# EAGLE board 20160614_DWC_LSM9DS1 (EAGLE 7.4.0)
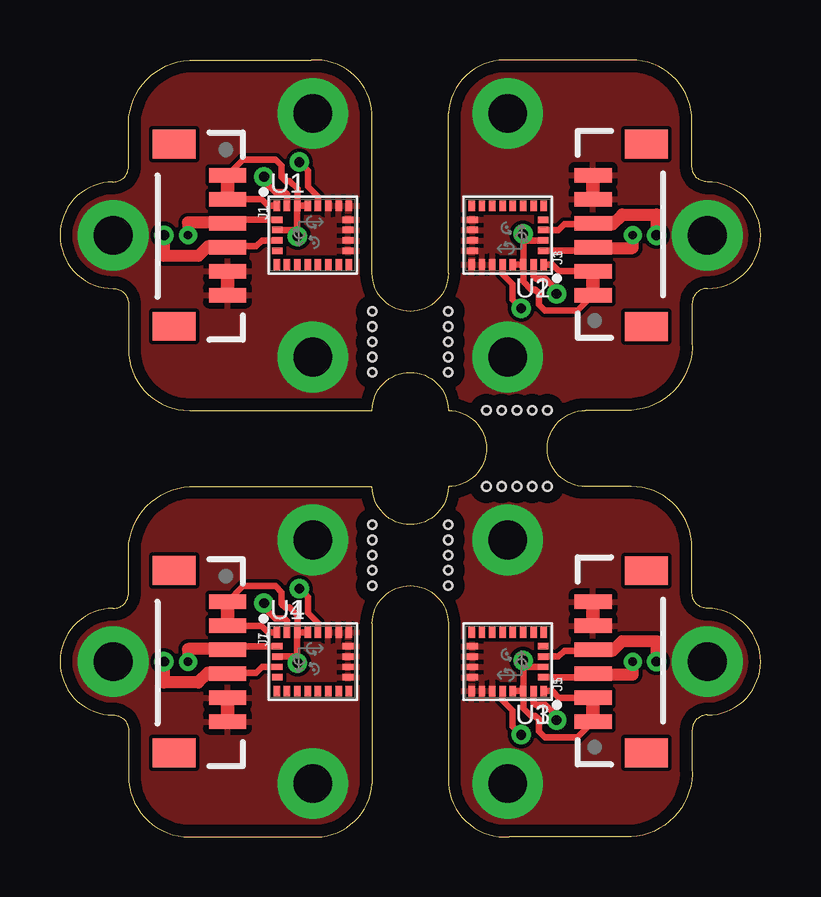
[diagram p0: board, top side]
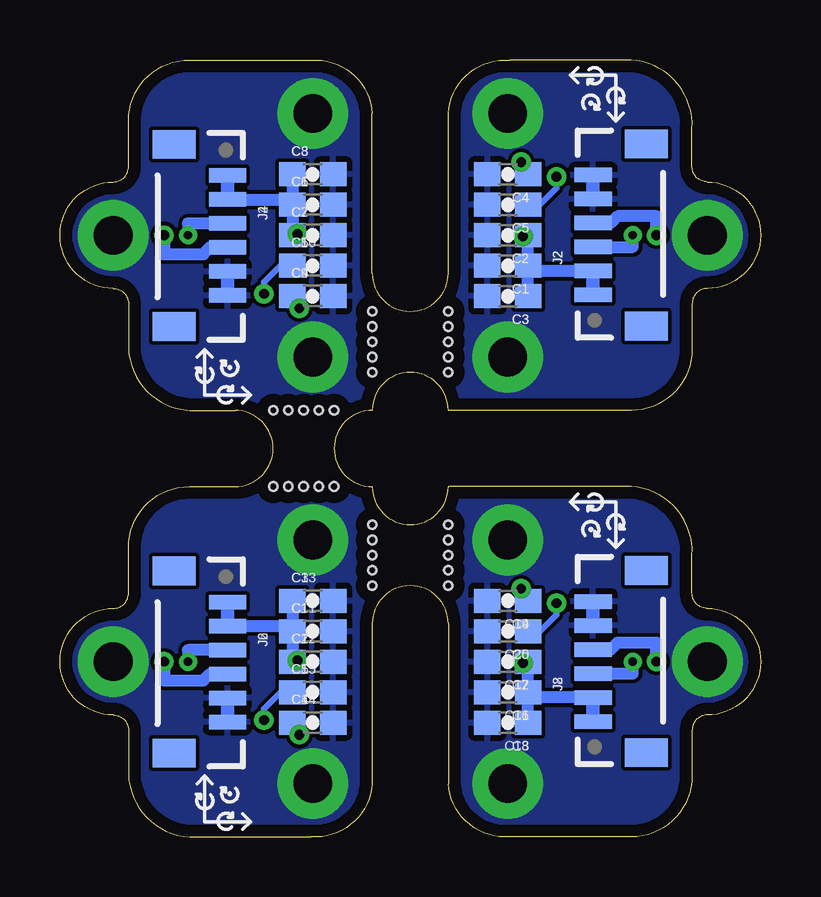
[diagram p1: board, bottom side, seen from below]

Size 29.21 x 32.39 mm. Coordinates in mm from the lower left corner, seen from the top.
Outline: 2.22,27.31 arc90 0,25.09 arc90 2.22,22.86 arc-90 2.86,22.23 2.86,20.32 arc90 5.4,17.78 13.02,17.78 arc-180 16.19,17.78 arc-180 16.19,14.61 arc-180 13.02,14.61 5.4,14.61 arc90 2.86,11.75 2.86,10.16 arc-90 2.22,9.53 arc90 0,7.31 arc90 2.22,5.08 arc-90 2.86,4.45 2.86,2.54 arc90 5.4,0 10.48,0 arc90 13.02,2.23 13.02,8.89 arc-180 16.19,8.89 16.19,2.23 arc90 18.73,0 23.81,0 arc90 26.35,2.86 26.35,4.45 arc-90 26.99,5.08 arc90 29.21,7.31 arc90 26.99,9.53 arc-90 26.35,10.16 26.35,12.07 arc90 23.81,14.61 21.91,14.61 arc-180 21.91,17.78 23.81,17.78 arc90 26.35,20.64 26.35,22.23 arc-90 26.99,22.86 arc90 29.21,25.09 arc90 26.99,27.31 arc-90 26.35,27.94 26.35,29.85 arc90 23.81,32.39 18.73,32.39 arc90 16.19,30.17 16.19,23.5 arc-180 13.02,23.5 13.02,30.17 arc90 10.48,32.39 5.4,32.39 arc90 2.86,29.53 2.86,27.94 arc-90 2.22,27.31
Copper layers (1*16): Top 0.0178mm / dielectric 59mil / Bottom 0.0178mm
Design rules "SSC-EAGLE-2Lyr_v1.0.0.3": minimum track width 6mil, minimum drill 14mil, track to track 6mil, track to pad 6mil, pad to pad 6mil, via to via 6mil, smd to smd 6mil, copper to edge 20mil, drill to drill 16mil, minimum pad ring 8mil, minimum via ring 8mil, stop-mask expansion 3mil, vias tented up to drill 0mil, thermal gap 10mil
Holes 0.35 mm at 13.02,19.37 13.02,20.01 13.02,20.64 13.02,21.28 13.02,21.91 16.19,19.37 16.19,20.01 16.19,20.64 16.19,21.28 16.19,21.91 16.19,13.02 16.19,12.39 16.19,11.75 16.19,11.12 16.19,10.48 13.02,13.02 13.02,12.39 13.02,11.75 13.02,11.12 13.02,10.48 20.32,17.78 19.68,17.78 19.05,17.78 18.41,17.78 17.78,17.78 20.32,14.61 19.68,14.61 19.05,14.61 18.41,14.61 17.78,14.61

## Footprints (pad centres in the part's own frame; a part is rotated, then mirrored left to right if it is on the bottom)
0603-CAP = smd 1.1 x 1: 1 -0.85,0; 2 0.85,0
1X06-1MM = smd 0.6 x 1.55: 1 -2.54,1.27; 2 -1.54,1.27; 3 -0.54,1.27; 4 0.46,1.27; 5 1.46,1.27; 6 2.46,1.27 | smd 1.2 x 1.8: P$1 -3.84,-0.955; P$2 3.76,-0.955
LGA24-8X4 = smd 0.27 x 0.45: 1 -1.505,1.225; 6 -1.505,-1.225; 7 -1.075,-1.225; 8 -0.645,-1.225; 9 -0.215,-1.225; 10 0.215,-1.225; 11 0.645,-1.225; 12 1.075,-1.225; 13 1.505,-1.225; 18 1.505,1.225; 19 1.075,1.225; 20 0.645,1.225; 21 0.215,1.225; 22 -0.215,1.225; 23 -0.645,1.225; 24 -1.075,1.225 | smd 0.45 x 0.27: 2 -1.475,0.645; 3 -1.475,0.215; 4 -1.475,-0.215; 5 -1.475,-0.645; 14 1.475,-0.645; 15 1.475,-0.215; 16 1.475,0.215; 17 1.475,0.645

## Placement (x,y rotation side)
C1  0.1uF  [0603-CAP]  10.54,23.82 180 bottom
C2  0.1uF  [0603-CAP]  10.54,25.09 180 bottom
C3  10uF  [0603-CAP]  10.54,22.55 180 bottom
C4  10nF  [0603-CAP]  10.54,27.63 180 bottom
C5  0.1uF  [0603-CAP]  10.54,26.36 180 bottom
C6  0.1uF  [0603-CAP]  18.67,26.36 0 bottom
C7  0.1uF  [0603-CAP]  18.67,25.09 0 bottom
C8  10uF  [0603-CAP]  18.67,27.63 0 bottom
C9  10nF  [0603-CAP]  18.67,22.55 0 bottom
C10  0.1uF  [0603-CAP]  18.67,23.82 0 bottom
C11  0.1uF  [0603-CAP]  18.67,8.58 0 bottom
C12  0.1uF  [0603-CAP]  18.67,7.31 0 bottom
C13  10uF  [0603-CAP]  18.67,9.85 0 bottom
C14  10nF  [0603-CAP]  18.67,4.77 0 bottom
C15  0.1uF  [0603-CAP]  18.67,6.04 0 bottom
C16  0.1uF  [0603-CAP]  10.54,6.04 180 bottom
C17  0.1uF  [0603-CAP]  10.54,7.31 180 bottom
C18  10uF  [0603-CAP]  10.54,4.77 180 bottom
C19  10nF  [0603-CAP]  10.54,9.85 180 bottom
C20  0.1uF  [0603-CAP]  10.54,8.58 180 bottom
J1  [1X06-1MM]  5.71,25.05 270 top
J2  [1X06-1MM]  5.71,25.14 90 bottom
J3  [1X06-1MM]  23.5,25.13 90 top
J4  [1X06-1MM]  23.5,25.04 270 bottom
J5  [1X06-1MM]  23.5,7.35 90 top
J6  [1X06-1MM]  23.5,7.26 270 bottom
J7  [1X06-1MM]  5.71,7.27 270 top
J8  [1X06-1MM]  5.71,7.36 90 bottom
U1  LSM9DS1  [LGA24-8X4]  10.54,25.09 0 top
U2  LSM9DS1  [LGA24-8X4]  18.67,25.09 180 top
U3  LSM9DS1  [LGA24-8X4]  18.67,7.31 180 top
U4  LSM9DS1  [LGA24-8X4]  10.54,7.31 0 top

## Library data of the parts
C1-C20 = SparkFun-Passives
J1-J8 = SparkFun-Connectors
U1-U4 = SparkFun-Sensors; PROD_ID: IC-12536

## Nets
CS_A/G: U1.7
CS_A/G1: U2.7
CS_A/G2: U3.7
CS_A/G3: U4.7
CS_M: U1.8
CS_M1: U2.8
CS_M2: U3.8
CS_M3: U4.8
DEN_A/G: U1.13
DEN_A/G1: U2.13
DEN_A/G2: U3.13
DEN_A/G3: U4.13
DRDY_M: U1.9
DRDY_M1: U2.9
DRDY_M2: U3.9
DRDY_M3: U4.9
GND: C1.2 C2.2 C3.2 C4.2 C5.2 J1.5 J1.6 J2.5 J2.6 U1.14 U1.15 U1.16 U1.17 U1.18 U1.19 U1.20
GND1: C6.2 C7.2 C8.2 C9.2 C10.2 J3.5 J3.6 J4.5 J4.6 U2.14 U2.15 U2.16 U2.17 U2.18 U2.19 U2.20
GND2: C11.2 C12.2 C13.2 C14.2 C15.2 J5.5 J5.6 J6.5 J6.6 U3.14 U3.15 U3.16 U3.17 U3.18 U3.19 U3.20
GND3: C16.2 C17.2 C18.2 C19.2 C20.2 J7.5 J7.6 J8.5 J8.6 U4.14 U4.15 U4.16 U4.17 U4.18 U4.19 U4.20
INT1_A/G: U1.11
INT1_A/G1: U2.11
INT1_A/G2: U3.11
INT1_A/G3: U4.11
INT2_A/G: U1.12
INT2_A/G1: U2.12
INT2_A/G2: U3.12
INT2_A/G3: U4.12
INT_M: U1.10
INT_M1: U2.10
INT_M2: U3.10
INT_M3: U4.10
N$1: C9.1 U2.21
N$2: C4.1 U1.21
N$3: C5.1 U1.24
N$4: C10.1 U2.24
N$5: C14.1 U3.21
N$6: C15.1 U3.24
N$7: C19.1 U4.21
N$8: C20.1 U4.24
SCL: J1.3 J2.3 U1.2
SCL1: J3.3 J4.3 U2.2
SCL2: J5.3 J6.3 U3.2
SCL3: J7.3 J8.3 U4.2
SDA: J1.4 J2.4 U1.4
SDA1: J3.4 J4.4 U2.4
SDA2: J5.4 J6.4 U3.4
SDA3: J7.4 J8.4 U4.4
SDO_A/G: U1.5
SDO_A/G1: U2.5
SDO_A/G2: U3.5
SDO_A/G3: U4.5
SDO_M: U1.6
SDO_M1: U2.6
SDO_M2: U3.6
SDO_M3: U4.6
VDD: C1.1 C2.1 C3.1 J1.1 J1.2 J2.1 J2.2 U1.1 U1.3 U1.22 U1.23
VDD1: C6.1 C7.1 C8.1 J3.1 J3.2 J4.1 J4.2 U2.1 U2.3 U2.22 U2.23
VDD2: C11.1 C12.1 C13.1 J5.1 J5.2 J6.1 J6.2 U3.1 U3.3 U3.22 U3.23
VDD3: C16.1 C17.1 C18.1 J7.1 J7.2 J8.1 J8.2 U4.1 U4.3 U4.22 U4.23

## Tracks (layer width: path | path; a pad name or v marks a point on that pad's centre or on a via)
GND  (via drill 1.61 pad 2.95)
  Top 0.572: J1.5 J1.6
  Bottom 0.572: J2.6 J2.5
  other vias: 2.22,25.09 10.54,30.17 10.54,20.01
  pour Top: -0.95,34.29 14.92,34.29 14.92,15.88 -0.95,15.88
  pour Bottom: -0.95,36.83 14.29,36.83 14.29,16.83 -0.95,16.83
GND1  (via drill 1.61 pad 2.95)
  Top 0.572: J3.5 J3.6
  Bottom 0.572: J4.6 J4.5
  other vias: 26.99,25.09 18.67,20.01 18.67,30.17
  pour Bottom: 15.24,36.83 30.48,36.83 30.48,16.83 15.24,16.83
  pour Top: 14.61,34.61 30.48,34.61 30.48,16.2 14.61,16.2
GND2  (via drill 1.61 pad 2.95)
  Top 0.572: J5.5 J5.6
  Bottom 0.572: J6.6 J6.5
  other vias: 26.99,7.31 18.67,2.23 18.67,12.39
  pour Top: 15.24,15.56 31.11,15.56 31.11,-2.85 15.24,-2.85
  pour Bottom: 15.24,16.2 30.48,16.2 30.48,-3.81 15.24,-3.81
GND3  (via drill 1.61 pad 2.95)
  Top 0.572: J7.5 J7.6
  Bottom 0.572: J8.6 J8.5
  other vias: 2.22,7.31 10.54,12.39 10.54,2.23
  pour Top: -1.27,15.24 14.61,15.24 14.61,-3.17 -1.27,-3.17
  pour Bottom: -0.95,16.2 14.29,16.2 14.29,-3.81 -0.95,-3.81
N$1  (via drill 0.41)
  Top 0.267: U2.21 18.45,23.47 18.87,23.05 18.87,22.39 v19.23,22.04
  Bottom 0.267: v19.23,22.04 19.11,22.14 C9.1
N$2  (via drill 0.41)
  Top 0.267: U1.21 10.76,26.7 10.34,27.12 10.34,27.78 v9.98,28.14
  Bottom 0.267: v9.98,28.14 10.1,28.03 C4.1
N$3  (via drill 0.41)
  Top 0.267: U1.24 9.47,26.8 9.37,26.89 8.97,26.89 8.51,27.35 v8.51,27.53
  Bottom 0.267: v8.51,27.53 8.51,27.04 9.2,26.36 C5.1
N$4  (via drill 0.41)
  Top 0.267: U2.24 19.74,23.38 19.84,23.28 20.24,23.28 20.7,22.83 v20.7,22.65
  Bottom 0.267: v20.7,22.65 20.7,23.13 20.02,23.82 C10.1
N$5  (via drill 0.41)
  Top 0.267: U3.21 18.45,5.69 18.87,5.28 18.87,4.61 v19.23,4.26
  Bottom 0.267: v19.23,4.26 19.11,4.36 C14.1
N$6  (via drill 0.41)
  Top 0.267: U3.24 19.74,5.6 19.84,5.5 20.24,5.5 20.7,5.05 v20.7,4.87
  Bottom 0.267: v20.7,4.87 20.7,5.35 20.02,6.04 C15.1
N$7  (via drill 0.41)
  Top 0.267: U4.21 10.76,8.92 10.34,9.34 10.34,10 v9.98,10.36
  Bottom 0.267: v9.98,10.36 10.1,10.25 C19.1
N$8  (via drill 0.41)
  Top 0.267: U4.24 9.47,9.02 9.37,9.11 8.97,9.11 8.51,9.57 v8.51,9.75
  Bottom 0.267: v8.51,9.75 8.51,9.26 9.2,8.58 C20.1
SCL  (via drill 0.34)
  Top 0.267: U1.2 7.09,25.73 J1.3
  Top 0.508: 6.98,25.62 5.33,25.62 v5.33,25.09
  Top 0.572: 6.98,25.62 J1.3
  Bottom 0.508: J2.3 5.33,24.6 v5.33,25.09
SCL1  (via drill 0.34)
  Top 0.267: U2.2 22.12,24.44 J3.3
  Top 0.508: 22.23,24.55 23.88,24.55 v23.88,25.09
  Top 0.572: 22.23,24.55 J3.3
  Bottom 0.508: J4.3 23.88,25.58 v23.88,25.09
SCL2  (via drill 0.34)
  Top 0.267: U3.2 22.12,6.66 J5.3
  Top 0.508: 22.23,6.77 23.88,6.77 v23.88,7.31
  Top 0.572: 22.23,6.77 J5.3
  Bottom 0.508: J6.3 23.88,7.8 v23.88,7.31
SCL3  (via drill 0.34)
  Top 0.267: U4.2 7.09,7.95 J7.3
  Top 0.508: 6.98,7.84 5.33,7.84 v5.33,7.31
  Top 0.572: 6.98,7.84 J7.3
  Bottom 0.508: J8.3 5.33,6.82 v5.33,7.31
SDA  (via drill 0.41)
  Top 0.267: U1.4 8.42,24.87 8.18,24.63 6.99,24.63 J1.4
  Top 0.508: 6.99,24.63 6.17,24.63 5.77,24.22 4.34,24.22 v4.34,25.09
  Bottom 0.508: v4.34,25.09 4.34,25.87 5.97,25.87 6.25,25.59 J2.4
SDA1  (via drill 0.41)
  Top 0.267: U2.4 20.79,25.3 21.03,25.54 22.22,25.54 J3.4
  Top 0.508: 22.22,25.54 23.04,25.54 23.44,25.95 24.87,25.95 v24.87,25.09
  Bottom 0.508: v24.87,25.09 24.87,24.3 23.24,24.3 22.96,24.58 J4.4
SDA2  (via drill 0.41)
  Top 0.267: U3.4 20.79,7.52 21.03,7.76 22.22,7.76 J5.4
  Top 0.508: 22.22,7.76 23.04,7.76 23.44,8.17 24.87,8.17 v24.87,7.31
  Bottom 0.508: v24.87,7.31 24.87,6.52 23.24,6.52 22.96,6.8 J6.4
SDA3  (via drill 0.41)
  Top 0.267: U4.4 8.42,7.09 8.18,6.85 6.99,6.85 J7.4
  Top 0.508: 6.99,6.85 6.17,6.85 5.77,6.44 4.34,6.44 v4.34,7.31
  Bottom 0.508: v4.34,7.31 4.34,8.09 5.97,8.09 6.25,7.82 J8.4
VDD  (via drill 0.41)
  Top 0.267: U1.3 9.89,25.3 | 9.89,25.3 v9.91,25.04 | 9.89,25.3 U1.23 | U1.23 U1.22 | U1.23 9.9,27.03 9.58,27.35 9.4,27.35 9.25,27.5 9.25,27.98 8.99,28.24 7.63,28.24 J1.1 | U1.1 8.68,26.31 8.4,26.59 J1.2
  Top 0.572: J1.2 J1.1
  Bottom 0.267: v9.91,25.04 C2.1
  Bottom 0.508: J2.2 9.47,23.6 C1.1 | C1.1 9.69,24.82 v9.91,25.04 | C3.1 C1.1
  Bottom 0.572: J2.1 J2.2
VDD1  (via drill 0.41)
  Top 0.267: U2.3 19.32,24.87 | 19.32,24.87 v19.3,25.14 | 19.32,24.87 U2.23 | U2.23 U2.22 | U2.23 19.31,23.15 19.63,22.83 19.81,22.83 19.96,22.67 19.96,22.19 20.22,21.94 21.58,21.94 J3.1 | U2.1 20.53,23.86 20.81,23.59 J3.2
  Top 0.572: J3.2 J3.1
  Bottom 0.267: v19.3,25.14 C7.1
  Bottom 0.508: J4.2 19.74,26.58 C6.1 | C6.1 19.52,25.35 v19.3,25.14 | C8.1 C6.1
  Bottom 0.572: J4.1 J4.2
VDD2  (via drill 0.41)
  Top 0.267: U3.3 19.32,7.09 | 19.32,7.09 v19.3,7.36 | 19.32,7.09 U3.23 | U3.23 U3.22 | U3.23 19.31,5.37 19.63,5.05 19.81,5.05 19.96,4.89 19.96,4.41 20.22,4.16 21.58,4.16 J5.1 | U3.1 20.53,6.08 20.81,5.81 J5.2
  Top 0.572: J5.2 J5.1
  Bottom 0.267: v19.3,7.36 C12.1
  Bottom 0.508: J6.2 19.74,8.8 C11.1 | C11.1 19.52,7.57 v19.3,7.36 | C13.1 C11.1
  Bottom 0.572: J6.1 J6.2
VDD3  (via drill 0.41)
  Top 0.267: U4.3 9.89,7.52 | 9.89,7.52 v9.91,7.26 | 9.89,7.52 U4.23 | U4.23 U4.22 | U4.23 9.9,9.25 9.58,9.57 9.4,9.57 9.25,9.72 9.25,10.2 8.99,10.46 7.63,10.46 J7.1 | U4.1 8.68,8.53 8.4,8.81 J7.2
  Top 0.572: J7.2 J7.1
  Bottom 0.267: v9.91,7.26 C17.1
  Bottom 0.508: J8.2 9.47,5.82 C16.1 | C16.1 9.69,7.04 v9.91,7.26 | C18.1 C16.1
  Bottom 0.572: J8.1 J8.2

## Text on the board
Treal_labels: X | Y | Z | Z | Y | X | X | Y | Z | Y | Z | X
_tNames: U1 | J1 | J1 | U1 | J1 | U1 | U1 | J1
_bNames: C3 | C4 | C1 | C5 | C2 | J2 | C5 | J2 | C2 | C1 | C4 | C3 | C3 | C4 | C1 | J2 | C5 | C2 | C2 | C5 | J2 | C4 | C1 | C3